# Altium PCB PCB2 Valiev.PcbDoc
Units mm, origin at the board's own origin, x right, y up, seen from the top; angles counter-clockwise.
Board outline 217.3 x 117.09 mm, 2 copper layers (Top Layer, Bottom Layer); 66 components, 52 nets, 197 pads, 19 vias.
Unrouted connection lines stored in the file: 5.
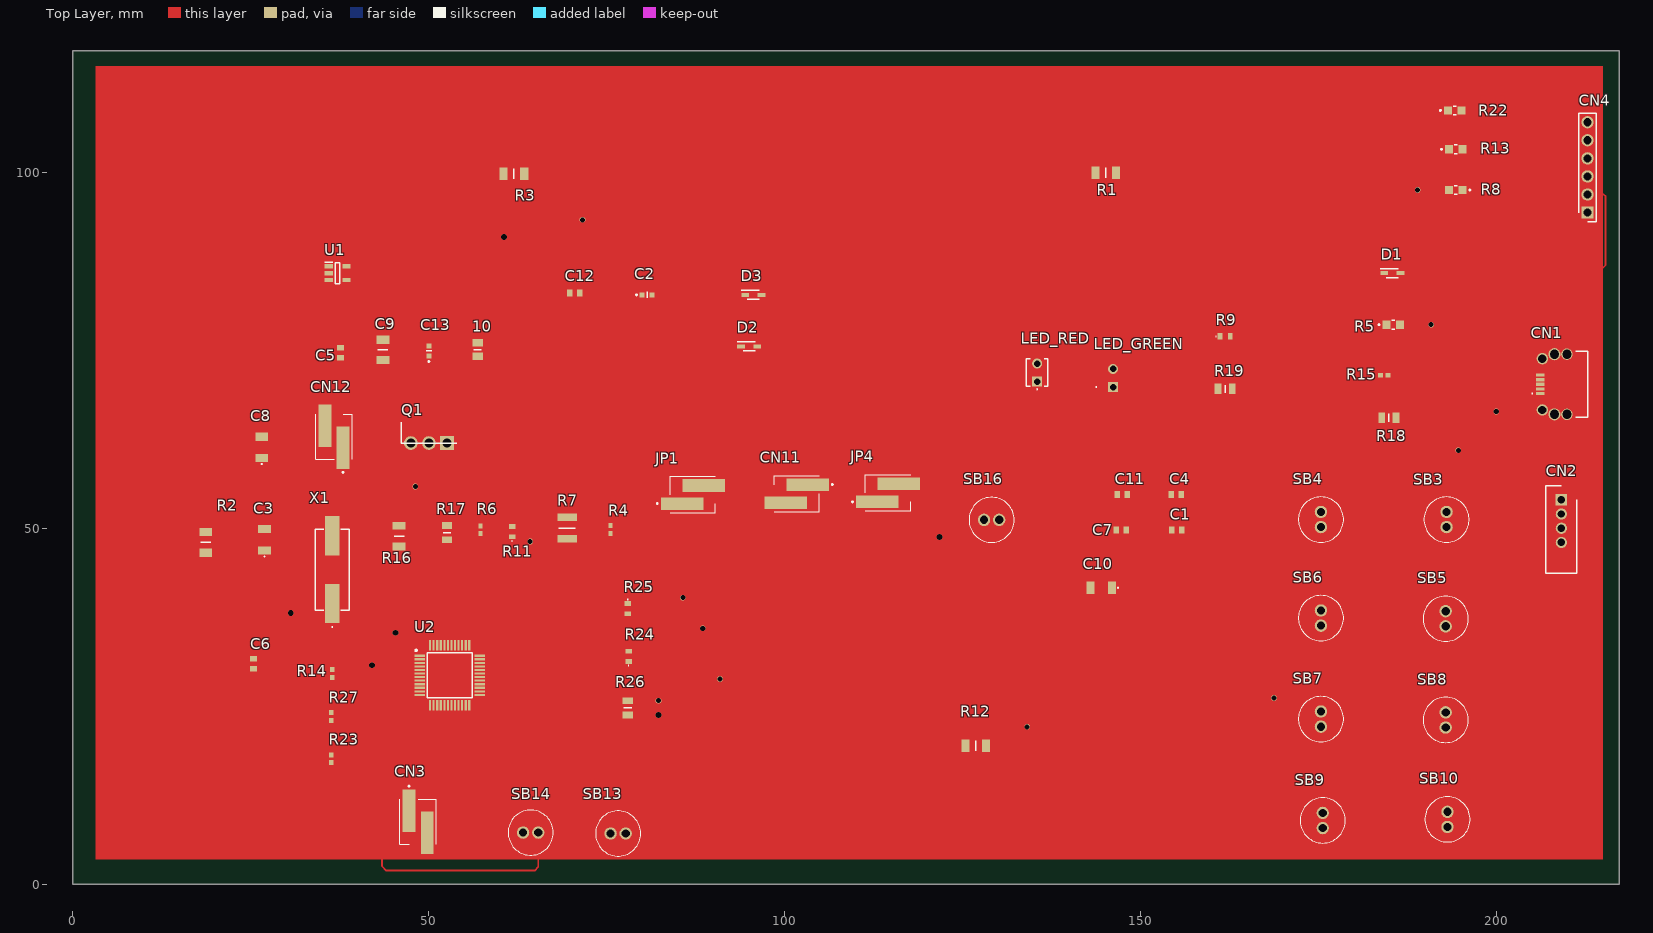
[diagram p0: Top Layer view]
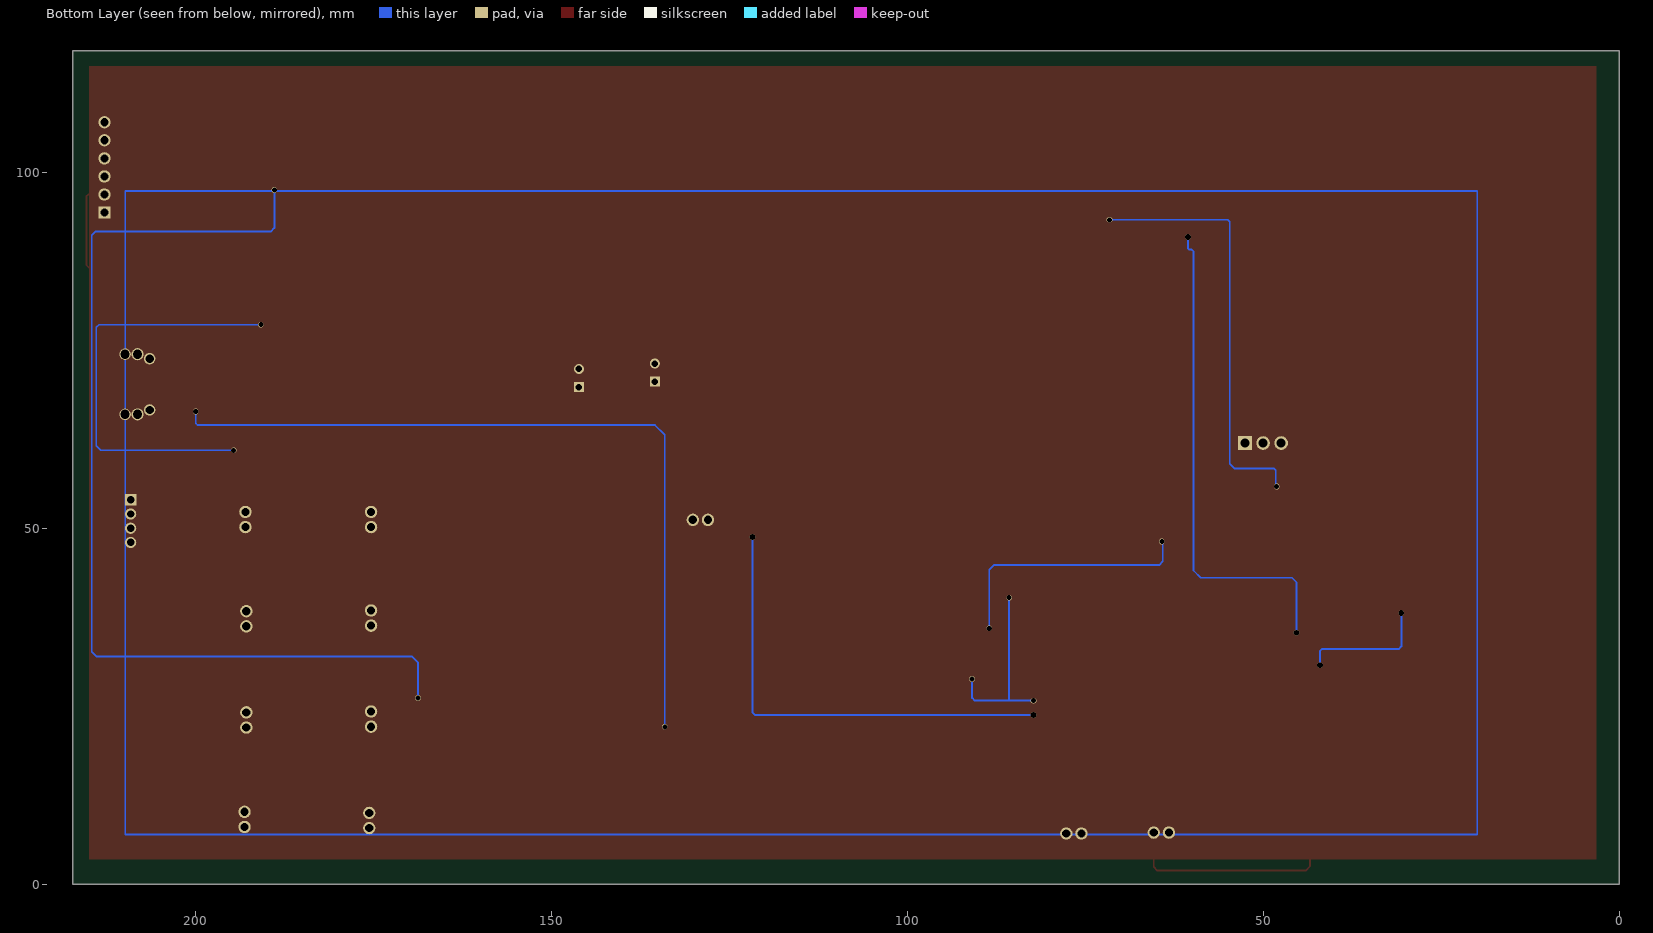
[diagram p1: Bottom Layer view, seen from below]
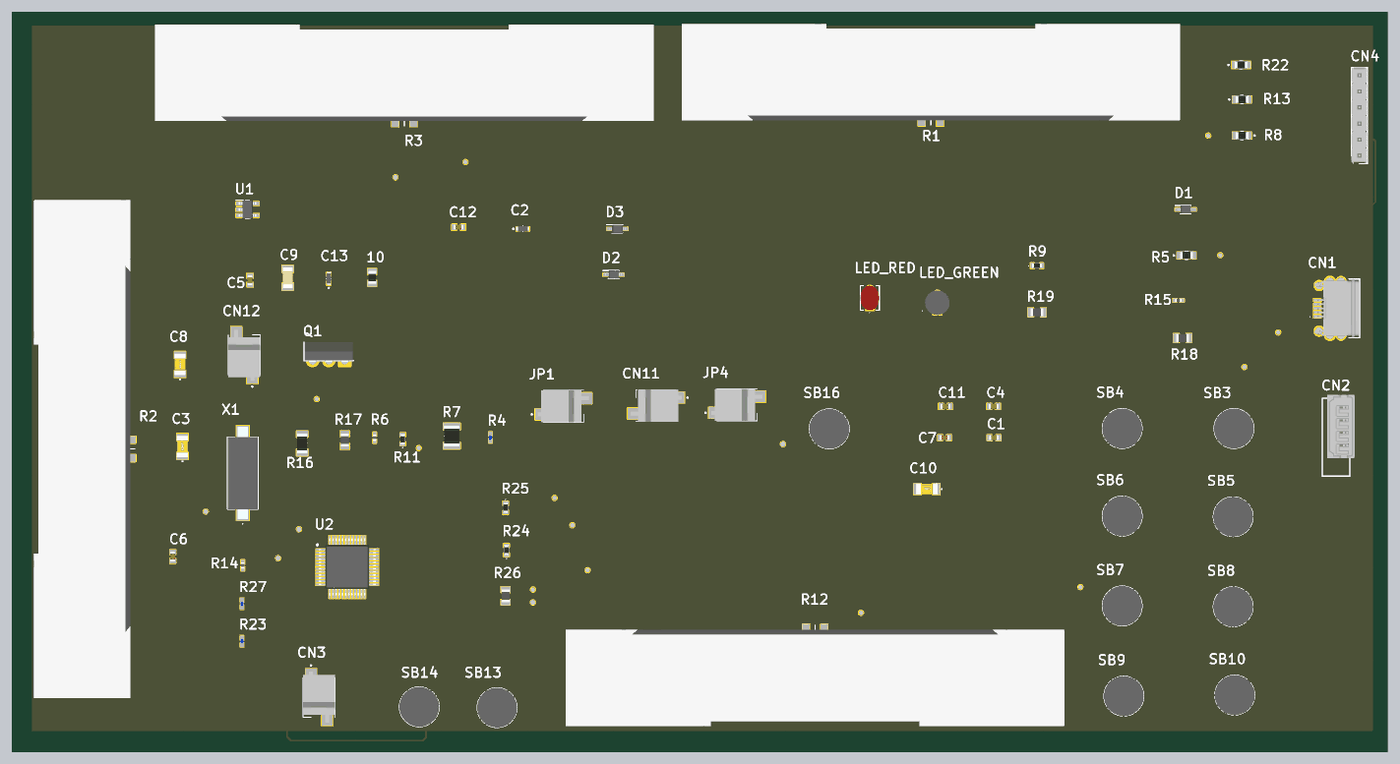
[diagram p2: 3D render of the assembled board from above, using the file's embedded part models]

## Layer stack, top to bottom
Top Solder: solder mask 0.0102, Solder Resist, Dk 3.5
Top Layer: signal copper 0.0356
Dielectric 1: dielectric 0.32, FR-4, Dk 4.8
Bottom Layer: signal copper 0.0356
Bottom Solder: solder mask 0.0102, Solder Resist, Dk 3.5

## Board outline
0,0 0,117.094 217.297,117.094 217.297,0

## Design rules (kind name [scope] priority, off if disabled: settings)
Clearance [All] p1: gap=0.254 ignorepadtopadclearanceinfootprint=FALSE
PolygonConnect [All] p1: connectstyle=Relief reliefconductorwidth=0.254 reliefentries=4 polygonreliefangle="90 Angle" airgapwidth=0.254
RoutingVias [All] p1: holewidth=0.711 width=1.27 viastyle="Through Hole" minholewidth=0.711 minwidth=1.27 maxholewidth=0.711 maxwidth=1.27
SolderMaskExpansion [All] p1: expansion=0.102 istentingtop=FALSE
Width [All] p1: maxlimit=0.254 minlimit=0.254 preferedwidth=0.254
30 further rules are at their usual default settings.

## Components (designator, comment, footprint, x,y, rotation, side; value= is the part's Value field where it differs from the comment)
10 "36k" RESC2012X55N 56.896,75.118 r270 top
C1 "100nF" CAPC1608X90N 155.132,49.784 r0 top
C2 "1uF" MAJx16 80.707,82.804 r0 top
C3 "20pF" C1206 26.924,48.387 r90 top
C4 "100nF" CAPC1608X90N 155.067,54.737 r0 top
C5 "100nF" CAPC1608X90N 37.592,74.676 r90 top
C6 "100nF" CAPC1608X90N 25.4,30.988 r270 top
C7 "100nF" CAPC1608X90N 147.32,49.784 r0 top
C8 "20pF" C1206 26.543,61.365 r90 top
C9 "10nF" CAPC3316X145N 43.561,75.057 r90 top
C10 "20pF" C1206 144.526,41.656 r180 top
C11 "100nF" CAPC1608X90N 147.447,54.737 r0 top
C12 "100nF" CAPC1608X90N 70.55,83.058 r180 top
C13 "1uF" MAJx16 50.038,74.93 r90 top
CN1 "204926-1103" 2049261103 209.423,70.231 r90 top
CN2 "53014-0410" SHDR4W60P0X200_1X4_1200X435X1000P 209.169,54.006 r90 top
CN3 "3-647166-2" 36471662 48.514,8.763 r180 top
CN4 "22-28-4062" HDRV6W66P0X254_1X6_1524X249X838P 212.852,94.361 r90 top
CN11 "3-647166-2" 36471662 101.731,54.864 r90 top
CN12 "3-647166-2" 36471662 36.703,62.861 r0 top
D1 "BAT60JFILM" SOD2513X117N 185.42,85.852 r0 top
D2 "BAT60JFILM" SOD2513X117N 95.043,75.565 r0 top
D3 "BAT60JFILM" SOD2513X117N 95.628,82.804 r0 top
JP1 "3-647166-2" 36471662 87.126,54.737 r270 top
JP4 "3-647166-2" 36471662 114.554,54.991 r270 top
LED_GREEN "C4SMA-GGY-CU2W37A1" C4SMAGGYCU2W37A1 146.177,69.85 r90 top
LED_RED "C4SMA-RGY-CS4V1BB1" C4SMARGYCS4V1BB1 135.509,70.612 r90 top
Q1 "BD139" TO254P290X760X1320-3P 52.578,61.976 r180 top
R1 "10k" RESC3216X74N 145.161,99.949 r180 top
R2 "10k" RESC3216X74N 18.669,48.006 r270 top
R3 "10k" RESC3216X74N 61.976,99.822 r180 top
R4 "4.7k" RESC1005X37N 75.565,49.826 r90 top
R5 "22" ERA6AEB1020V 185.547,78.613 r0 top
R6 "100k" RESC1005X40N 57.277,49.784 r90 top
R7 "2.7k" RESC3225X70N 69.469,50.038 r270 top
R8 "22" ERA6AEB1020V 194.31,97.536 r180 top
R9 "100" ERA3AEB101V 161.925,76.962 r0 top
R11 "100" ERA3AEB101V 61.722,49.53 r90 top
R12 "10k" RESC3216X74N 126.873,19.431 r0 top
R13 "22" ERA6AEB1020V 194.31,103.251 r0 top
R14 "100k" RESC1005X40N 36.449,29.591 r270 top
R15 "100k" RESC1005X40N 184.277,71.501 r180 top
R16 "1.5k" RESC3116X65N 45.847,48.895 r90 top
R17 "0" RESC2013X84N 52.578,49.403 r90 top
R18 "0" RESC2013X84N 184.928,65.532 r0 top
R19 "0" RESC2013X84N 161.925,69.596 r0 top
R22 "22" ERA6AEB1020V 194.183,108.712 r0 top
R23 "4.7k" RESC1005X37N 36.322,17.611 r90 top
R24 "100" ERA3AEB101V 78.105,32.004 r90 top
R25 "100" ERA3AEB101V 77.978,38.698 r270 top
R26 "0" RESC2013X84N 77.978,24.765 r90 top
R27 "4.7k" RESC1005X37N 36.322,23.537 r270 top
SB3 "8631CQD2" 8631CQD2 193.04,52.295 r270 top
SB4 "8631CQD2" 8631CQD2 175.387,50.165 r90 top
SB5 "8631CQD2" 8631CQD2 192.913,36.224 r90 top
SB6 "8631CQD2" 8631CQD2 175.387,38.452 r270 top
SB7 "8631CQD2" 8631CQD2 175.387,24.257 r270 top
SB8 "8631CQD2" 8631CQD2 192.913,24.13 r270 top
SB9 "8631CQD2" 8631CQD2 175.641,7.874 r90 top
SB10 "8631CQD2" 8631CQD2 193.167,10.16 r270 top
SB13 "8631CQD2" 8631CQD2 75.565,7.112 r0 top
SB14 "8631CQD2" 8631CQD2 63.275,7.239 r0 top
SB16 "8631CQD2" 8631CQD2 128.045,51.181 r0 top
U1 "LD3985M33R" SOT95P280X145-5N 37.211,85.852 r0 top
U2 "STM32F103CBT6" QFP50P900X900X160-48N 52.959,29.337 r0 top
X1 "ECS-80-12-5PX-GM-TR" ECS80125PXGMTR 36.449,44.196 r90 top

## Footprints (in the part's own frame and the unit in brackets; to place one, negate y for a bottom-side part, rotate by r counter-clockwise, add the part's x,y. Pads: shape width x height; smd on the part's side, far side on the other; paste and mask are expansions set on the pad)
8631CQD2 [mm]
  round 1.74 hole 1.16: 1(0,0) 2(2.13,0)
  silkscreen extent -2.11,-3.17 4.24,3.17, body extent -2.11,-3.18 4.24,3.18, height 14.03
36471662 [mm]
  rect 1.78x5.97 smd: 1(1.27,-1.52) 2(-1.27,1.52)
  silkscreen extent -2.54,-5.1 2.54,3.18, body extent -2.54,-4.08 2.54,4, height 10.55
2049261103 [mm]
  rect 0.45x1.2 smd: 1(-1.3,3.225) 2(-0.65,3.225) 3(0,3.225) 4(0.65,3.225) 5(1.3,3.225)
  round 1.6 hole 1.17: MH1(-3.6,2.925) MH2(3.6,2.925)
  round 1.7 hole 1.3: MH3(-4.225,1.225) MH4(4.225,1.225)
  round 1.6 hole 1.3: MH5(-4.225,-0.525) MH6(4.225,-0.525)
  silkscreen extent -4.65,-3.47 4.65,4.4, body extent -4.65,-3.32 4.65,3.68, height 3.83
C4SMAGGYCU2W37A1 [mm]
  rect 1.416x1.416 hole 0.91: 1(0,0)
  round 1.416 hole 0.91: 2(2.54,0)
  silkscreen extent -0.05,2.3 0.05,2.4, body extent -0.68,-1.95 3.22,1.95, height 8.9
C4SMARGYCS4V1BB1 [mm]
  rect 1.416x1.416 hole 0.91: 1(0,0)
  round 1.416 hole 0.91: 2(2.54,0)
  silkscreen extent -1.13,-1.5 3.22,1.5, body extent -0.68,-1.5 3.22,1.5, height 10.14
C1206 [mm]
  rect 1.15x1.8 smd: 1(-1.5,0) 2(1.5,0)
  silkscreen extent -2.4,-0.05 -2.3,0.05, body extent -1.7,-0.9 1.7,0.9, height 1.75
CAPC1608X90N [mm]
  rect 0.78x0.99 smd: 1(-0.7,0) 2(0.7,0)
  body extent -0.8,-0.41 0.8,0.41, height 0.9
CAPC3316X145N [mm]
  rect 1.17x1.82 smd: 1(-1.42,0) 2(1.42,0)
  silkscreen extent 0,-0.7 0,0.7, body extent -1.65,-0.8 1.65,0.8, height 1.68
ECS80125PXGMTR [mm]
  rect 5.5x2 smd: 1(-4.75,0) 2(4.75,0)
  silkscreen extent -8.1,-2.4 5.7,2.4, body extent -7.3,-2.4 7.3,2.4, height 4.4
ERA3AEB101V [mm]
  rect 0.65x0.9 smd: 1(-0.725,0) 2(0.725,0)
  silkscreen extent -1.35,-0.05 -1.25,0.05, body extent -0.8,-0.4 0.8,0.4, height 0.45
ERA6AEB1020V [mm]
  rect 1.15x1.15 smd: 1(-0.95,0) 2(0.95,0)
  silkscreen extent -2.1,-0.63 0.2,0.63, body extent -1,-0.63 1,0.63, height 0.5
HDRV6W66P0X254_1X6_1524X249X838P [mm]
  rect 1.725x1.725 hole 1.15: 1(0,0)
  round 1.725 hole 1.15: 2(2.54,0) 3(5.08,0) 4(7.62,0) 5(10.16,0) 6(12.7,0)
  silkscreen extent -1.27,-1.24 13.97,1.24, body extent -1.27,-1.24 13.97,1.24, height 9.65
MAJx16 [mm]
  rect 0.7x0.7 smd: 1(-0.7,0) 2(0.7,0)
  silkscreen extent -1.6,-0.4 0,0.4, body extent -0.98,-0.4 0.98,0.4, height 0.9
QFP50P900X900X160-48N [mm]
  rect 1.475x0.3 smd: 1(-4.238,2.75) 2(-4.238,2.25) 3(-4.238,1.75) 4(-4.238,1.25) 5(-4.238,0.75) 6(-4.238,0.25) 7(-4.238,-0.25) 8(-4.238,-0.75) 9(-4.238,-1.25) 10(-4.238,-1.75) 11(-4.238,-2.25) 12(-4.238,-2.75) 25(4.238,-2.75) 26(4.238,-2.25) 27(4.238,-1.75) 28(4.238,-1.25) 29(4.238,-0.75) 30(4.238,-0.25) 31(4.238,0.25) 32(4.238,0.75) 33(4.238,1.25) 34(4.238,1.75) 35(4.238,2.25) 36(4.238,2.75)
  rect 0.3x1.475 smd: 13(-2.75,-4.238) 14(-2.25,-4.238) 15(-1.75,-4.238) 16(-1.25,-4.238) 17(-0.75,-4.238) 18(-0.25,-4.238) 19(0.25,-4.238) 20(0.75,-4.238) 21(1.25,-4.238) 22(1.75,-4.238) 23(2.25,-4.238) 24(2.75,-4.238) 37(2.75,4.238) 38(2.25,4.238) 39(1.75,4.238) 40(1.25,4.238) 41(0.75,4.238) 42(0.25,4.238) 43(-0.25,4.238) 44(-0.75,4.238) 45(-1.25,4.238) 46(-1.75,4.238) 47(-2.25,4.238) 48(-2.75,4.238)
  silkscreen extent -4.85,-3.15 3.15,3.62, body extent -4.5,-4.5 4.5,4.5, height 1.6
RESC1005X37N [mm]
  rect 0.7x0.6 smd: 1(-0.55,0) 2(0.55,0)
  body extent -0.5,-0.25 0.5,0.25, height 0.32
RESC1005X40N [mm]
  rect 0.7x0.6 smd: 1(-0.55,0) 2(0.55,0)
  body extent -0.5,-0.25 0.5,0.25, height 0.4
RESC2012X55N [mm]
  rect 1x1.45 smd: 1(-0.95,0) 2(0.95,0)
  silkscreen extent 0,-0.53 0,0.53, body extent -1,-0.63 1,0.63, height 0.55
RESC2013X84N [mm]
  rect 0.95x1.45 smd: 1(-1,0) 2(1,0)
  silkscreen extent 0,-0.54 0,0.54, body extent -1.01,-0.64 1.01,0.64, height 0.36
RESC3116X65N [mm]
  rect 1.1x1.8 smd: 1(-1.45,0) 2(1.45,0)
  silkscreen extent 0,-0.7 0,0.7, body extent -1.55,-0.8 1.55,0.8, height 0.65
RESC3216X74N [mm]
  rect 1.15x1.8 smd: 1(-1.45,0) 2(1.45,0)
  silkscreen extent 0,-0.7 0,0.7, body extent -39.37,-15.24 39.37,0, height 40.64
RESC3225X70N [mm]
  rect 1.1x2.7 smd: 1(-1.5,0) 2(1.5,0)
  silkscreen extent 0,-1.15 0,1.15, body extent -1.6,-1.25 1.6,1.25, height 0.7
SHDR4W60P0X200_1X4_1200X435X1000P [mm]
  rect 1.575x1.575 hole 1.05: 1(0,0)
  round 1.575 hole 1.05: 2(-2,0) 3(-4,0) 4(-6,0)
  silkscreen extent -10.3,-2.17 2,2.17, body extent -7.45,-2.96 2.55,1.39, height 5.85
SOD2513X117N [mm]
  rect 1.085x0.55 smd: 1(-1.14,0) 2(1.14,0)
  silkscreen extent -1.68,-0.64 0.83,0.64, body extent -1.25,-0.64 1.25,0.64, height 1.17
SOT95P280X145-5N [mm]
  rect 1.15x0.6 smd: 1(-1.25,0.95) 2(-1.25,0) 3(-1.25,-0.95) 4(1.25,-0.95) 5(1.25,0.95)
  silkscreen extent -1.83,-1.48 0.33,1.5, body extent -1.4,-1.48 1.4,1.48, height 1.45
TO254P290X760X1320-3P [mm]
  rect 1.92x1.92 hole 1.28: 1(0,0)
  round 1.92 hole 1.28: 2(2.54,0) 3(5.08,0)
  silkscreen extent -1.36,-2.9 6.44,0, body extent -1.26,-2.9 6.34,0.26, height 12.93

## Part data
10: library part TNPW080536K0BEEA, "Resistor", Manufacturer_Name=Vishay, Datasheet Link=https://www.vishay.com/docs/31006/tnpw.pdf, Height=0.55mm, Manufacturer_Part_Number=TNPW080536K0BEEA
C1 C4 C5 C6 C7 C11 C12: library part 06035C104K4T4A, "Capacitor", Manufacturer_Name="Kyocera AVX", Mouser Part Number=581-06035C104K4T4A, Arrow Part Number=06035C104K4T4A, Arrow Price/Stock=https://www.arrow.com/en/products/06035c104k4t4a/avx, Datasheet Link=https://componentsearchengine.com/Datasheets/1/06031A100FAT2A.pdf, Height=100nF, Manufacturer_Part_Number=06035C104K4T4A, Mouser Price/Stock=https://www.mouser.co.uk/ProductDetail/KYOCERA-AVX/06035C104K4T4A?qs=NBj5Hwer2CEXBYKT%252BbuSBA%3D%3D
C2 C13: library part MAJCT168BB7105KTEA01, "Capacitor", Manufacturer_Name="TAIYO YUDEN", Datasheet Link=https://ds.yuden.co.jp/TYCOMPAS/or/detail?pn=MAJCT168BB7105KTEA01, Height=0.8mm, Manufacturer_Part_Number=MAJCT168BB7105KTEA01
C3 C8 C10: library part C1206C200KCGACTU, "Capacitor", Manufacturer_Name=KEMET, Datasheet Link=https://content.kemet.com/datasheets/KEM_C1009_C0G_HV_SMD.pdf, Manufacturer_Part_Number=C1206C200KCGACTU
C9: library part KGM31GCG2J103JU, "Capacitor", Manufacturer_Name="Kyocera AVX", Mouser Part Number=581-KGM31GCG2J103JU, Datasheet Link=https://datasheets.kyocera-avx.com/HVKGM.pdf, Height=1.45mm, Manufacturer_Part_Number=KGM31GCG2J103JU, Mouser Price/Stock=https://www.mouser.co.uk/ProductDetail/KYOCERA-AVX/KGM31GCG2J103JU?qs=63Lh8XYXgjt6ivbLeGkCxg%3D%3D
CN1: "Connector", Manufacturer_Name=Molex, Mouser Part Number=538-204926-1103, Arrow Part Number=204926-1103, Arrow Price/Stock=https://www.arrow.com/en/products/204926-1103/molex?region=nac, Datasheet Link=https://www.molex.com/content/dam/molex/molex-dot-com/products/automated/en-us/salesdrawingpdf/204/204926/2049261103_sd.pdf, Height=4.65mm, Manufacturer_Part_Number=204926-1103, Mouser Price/Stock=https://www.mouser.co.uk/ProductDetail/Molex/204926-1103?qs=55YtniHzbhBOQihiQOeiLg%3D%3D
CN2: "Connector", Manufacturer_Name=Molex, Mouser Part Number=538-53014-0410, Datasheet Link=https://www.molex.com/pdm_docs/sd/530140410_sd.pdf, Height=10mm, Manufacturer_Part_Number=53014-0410, Mouser Price/Stock=https://www.mouser.co.uk/ProductDetail/Molex/53014-0410?qs=TLs3Kb%252BkMqKk8s1WRHwRGw%3D%3D
CN3 CN11 CN12 JP1 JP4: "Connector", Manufacturer_Name="TE Connectivity", Mouser Part Number=571-3-647166-2, Arrow Part Number=3-647166-2, Arrow Price/Stock=https://www.arrow.com/en/products/3-647166-2/te-connectivity?region=nac, Datasheet Link=https://www.te.com/commerce/DocumentDelivery/DDEController?Action=showdoc&DocId=Customer+Drawing%7F647166%7FR1%7Fpdf%7FEnglish%7FENG_CD_647166_R1.pdf%7F3-647166-2, Height=10.66mm, Manufacturer_Part_Number=3-647166-2, Mouser Price/Stock=https://www.mouser.co.uk/ProductDetail/TE-Connectivity/3-647166-2?qs=xsTFCgGnzbJU1qz6Np9kzA%3D%3D
CN4: "Connector", Manufacturer_Name=Molex, Mouser Part Number=538-22-28-4062, Datasheet Link=https://datasheet.datasheetarchive.com/originals/distributors/SFDatasheet-1/sf-00031037.pdf, Height=8.38mm, Manufacturer_Part_Number=22-28-4062, Mouser Price/Stock=https://www.mouser.com/Search/Refine.aspx?Keyword=538-22-28-4062
D1 D2 D3: "Schottky Diode", Manufacturer_Name=STMicroelectronics, Mouser Part Number=511-BAT60JFILM, Arrow Part Number=BAT60JFILM, Arrow Price/Stock=https://www.arrow.com/en/products/bat60jfilm/stmicroelectronics?region=nac, Datasheet Link=https://www.mouser.jp/datasheet/2/389/cd00001944-1795661.pdf, Height=1.17mm, Manufacturer_Part_Number=BAT60JFILM, Mouser Price/Stock=https://www.mouser.co.uk/ProductDetail/STMicroelectronics/BAT60JFILM?qs=GnFZssByvVVVnMaukcyLZg%3D%3D
LED_GREEN: "LED", Manufacturer_Name="CREE LED", Mouser Part Number=941-C4SMAGGYCU2W37A1, Datasheet Link=https://cree-led.com/media/documents/C4SMA-1442.pdf, Height=8.8mm, Manufacturer_Part_Number=C4SMA-GGY-CU2W37A1, Mouser Price/Stock=https://www.mouser.co.uk/ProductDetail/Cree-LED/C4SMA-GGY-CU2W37A1?qs=7D1LtPJG0i1gnYL5Rh9Mjg%3D%3D
LED_RED: "LED", Manufacturer_Name="CREE LED", Mouser Part Number=941-C4SMARGYCS4V1BB1, Arrow Part Number=C4SMA-RGY-CS4V1BB1, Arrow Price/Stock=https://www.arrow.com/en/products/c4sma-rgy-cs4v1bb1/cree-led?region=nac, Datasheet Link=https://cree-led.com/media/documents/C4SMA-1442.pdf, Height=8.8mm, Manufacturer_Part_Number=C4SMA-RGY-CS4V1BB1, Mouser Price/Stock=https://www.mouser.co.uk/ProductDetail/Cree-LED/C4SMA-RGY-CS4V1BB1?qs=7D1LtPJG0i08%2Fw1qRIcnyw%3D%3D
Q1: "Transistor BJT NPN", Manufacturer_Name=STMicroelectronics, Mouser Part Number=511-BD139, Arrow Part Number=BD139, Arrow Price/Stock=https://www.arrow.com/en/products/bd139/stmicroelectronics?region=europe, Datasheet Link=http://www.st.com/web/en/resource/technical/document/datasheet/CD00001225.pdf, Height=2.9mm, Manufacturer_Part_Number=BD139, Mouser Price/Stock=https://www.mouser.co.uk/ProductDetail/STMicroelectronics/BD139?qs=ljbEvF4DwOPW%2FLxHSWYMMA%3D%3D
R1 R2 R3 R12: library part CRMV1206AF10K0FKE5, "Resistor", Manufacturer_Name=Vishay, Mouser Part Number=71-RMV1206AF10K0FKE5, Datasheet Link=https://www.vishay.com/docs/68037/crmv.pdf, Height=0.74mm, Manufacturer_Part_Number=CRMV1206AF10K0FKE5, Mouser Price/Stock=https://www.mouser.co.uk/ProductDetail/Vishay-Techno/CRMV1206AF10K0FKE5?qs=l8RvIzyJx4lLA%2F4RSSc%2F9A%3D%3D
R4 R23 R27: library part MCS04020D4701BE000, "Resistor", Manufacturer_Name=Vishay, Mouser Part Number=594-MCS04020D4701BE0, Datasheet Link=http://www.vishay.com/docs/28705/mcx0x0xpro.pdf, Height=0.37mm, Manufacturer_Part_Number=MCS04020D4701BE000, Mouser Price/Stock=https://www.mouser.co.uk/ProductDetail/Vishay-Beyschlag/MCS04020D4701BE000?qs=ft9OtscSA3%252BR0DpF5QqL2Q%3D%3D
R5 R8 R13 R22: library part ERA-6AHD220V, "Resistor", Manufacturer_Name=Panasonic, Mouser Part Number=667-ERA-6AHD220V, Datasheet Link=https://industrial.panasonic.com/cdbs/www-data/pdf/RDM0000/AOA0000C307.pdf, Height=0.6mm, Manufacturer_Part_Number=ERA-6AHD220V, Mouser Price/Stock=https://www.mouser.co.uk/ProductDetail/Panasonic/ERA-6AHD220V/?qs=MNPzkKEzRtQTWqg2JSKn2A%3D%3D
R6 R14 R15: library part SFR01MZPF1003, "Resistor", Manufacturer_Name="ROHM Semiconductor", Mouser Part Number=755-SFR01MZPF1003, Datasheet Link=https://fscdn.rohm.com/en/products/databook/datasheet/passive/resistor/chip_resistor/sfr-e.pdf, Height=0.4mm, Manufacturer_Part_Number=SFR01MZPF1003, Mouser Price/Stock=https://www.mouser.co.uk/ProductDetail/ROHM-Semiconductor/SFR01MZPF1003?qs=Mv7BduZupUj2RFL5gMaKTg%3D%3D
R7: library part CRCW12102K70FKEAHP, "Resistor", Manufacturer_Name=Vishay, Mouser Part Number=71-CRCW12102K70FKEAH, Datasheet Link=http://componentsearchengine.com/Datasheets/1/CRCW12102K70FKEAHP.pdf, Height=0.7mm, Manufacturer_Part_Number=CRCW12102K70FKEAHP, Mouser Price/Stock=https://www.mouser.co.uk/ProductDetail/Vishay-Dale/CRCW12102K70FKEAHP?qs=OAzHGkhREL0m0%252BU1n6AaAg%3D%3D
R9 R11 R24 R25: library part ERA-3AED101V, "Resistor", Manufacturer_Name=Panasonic, Mouser Part Number=667-ERA-3AED101V, Arrow Part Number=ERA-3AED101V, Arrow Price/Stock=https://www.arrow.com/en/products/era-3aed101v/panasonic, Datasheet Link=https://industrial.panasonic.com/cdbs/www-data/pdf/RDM0000/AOA0000C307.pdf, Height=0.55mm, Manufacturer_Part_Number=ERA-3AED101V, Mouser Price/Stock=https://www.mouser.co.uk/ProductDetail/Panasonic/ERA-3AED101V?qs=MNPzkKEzRtTdzGewEn1kig%3D%3D
R16: library part CRCW12061K50FKEAHP, "Resistor", Manufacturer_Name=Vishay, Mouser Part Number=71-CRCW12061K50FKEAH, Arrow Part Number=CRCW12061K50FKEAHP, Arrow Price/Stock=https://www.arrow.com/en/products/crcw12061k50fkeahp/vishay?region=nac, Datasheet Link=http://componentsearchengine.com/Datasheets/1/CRCW12061K50FKEAHP.pdf, Height=0.65mm, Manufacturer_Part_Number=CRCW12061K50FKEAHP, Mouser Price/Stock=https://www.mouser.co.uk/ProductDetail/Vishay-Dale/CRCW12061K50FKEAHP?qs=k2%2FDWSARqgEwHXAQbL4aEg%3D%3D
R17 R18 R19 R26: library part WSL080500000ZEA9, "Resistor", Manufacturer_Name=Vishay, Mouser Part Number=71-WSL080500000ZEA9, Arrow Part Number=WSL080500000ZEA9, Arrow Price/Stock=https://www.arrow.com/en/products/wsl080500000zea9/vishay?region=nac, Datasheet Link=https://ad.componentsearchengine.com/Datasheets/2/WSL080500000ZEA9.pdf, Height=0.838mm, Manufacturer_Part_Number=WSL080500000ZEA9, Mouser Price/Stock=https://www.mouser.co.uk/ProductDetail/Vishay-Dale/WSL080500000ZEA9?qs=f1l5vAGoKgsImKS87N8TmQ%3D%3D
SB3 SB4 SB5 SB6 SB7 SB8 SB9 SB10 SB13 SB14 SB16: "Switch (2-Pin Push)", Manufacturer_Name="C & K COMPONENTS", Mouser Part Number=611-8631-261, Datasheet Link=https://www.ckswitches.com/media/1396/8600.pdf, Height=13.93mm, Manufacturer_Part_Number=8631CQD2, Mouser Price/Stock=https://www.mouser.co.uk/ProductDetail/CK/8631CQD2?qs=ktcBc77oICXe9iPhfEwnkA%3D%3D
U1: "Integrated Circuit", Manufacturer_Name=STMicroelectronics, Mouser Part Number=511-LD3985M33R, Arrow Part Number=LD3985M33R, Arrow Price/Stock=https://www.arrow.com/en/products/ld3985m33r/stmicroelectronics?region=europe, Datasheet Link=http://www.st.com/st-web-ui/static/active/en/resource/technical/document/datasheet/CD00003395.pdf, Height=1.45mm, Manufacturer_Part_Number=LD3985M33R, Mouser Price/Stock=https://www.mouser.co.uk/ProductDetail/STMicroelectronics/LD3985M33R?qs=22WmWNTp1rrPOccVv4HZ7A%3D%3D
U2: "Integrated Circuit", Manufacturer_Name=STMicroelectronics, Mouser Part Number=511-STM32F103CBT6, Arrow Part Number=STM32F103CBT6, Arrow Price/Stock=https://www.arrow.com/en/products/stm32f103cbt6/stmicroelectronics?region=europe, Datasheet Link=http://www.st.com/st-web-ui/static/active/en/resource/technical/document/datasheet/CD00161566.pdf, Height=1.6mm, Manufacturer_Part_Number=STM32F103CBT6, Mouser Price/Stock=https://www.mouser.co.uk/ProductDetail/STMicroelectronics/STM32F103CBT6?qs=WxFF5lh7QM3goh6GV5Ogig%3D%3D
X1: "Crystal or Oscillator", Manufacturer_Name=ECS, Mouser Part Number=520-80-12-5PX-GM-TR, Datasheet Link=https://ecsxtal.com/store/pdf/csm-7x.pdf, Height=4.3mm, Manufacturer_Part_Number=ECS-80-12-5PX-GM-TR, Mouser Price/Stock=https://www.mouser.co.uk/ProductDetail/ECS/ECS-80-12-5PX-GM-TR?qs=amGC7iS6iy%252BwzUdIY7WpOA%3D%3D

## Via types
v1: diameter 0.8, hole 0.711, Top Layer to Bottom Layer, 13 vias
v2: diameter 0.8, hole 0.8, Top Layer to Bottom Layer, 3 vias
v3: diameter 0.811, hole 0.811, Top Layer to Bottom Layer, 3 vias

## Nets (pads, with @x,y where several pads share a name; then routed paths per layer and width w, separated by ;. In a path a pad name is that pad's centre, name@x,y a point inside that pad or via, vN(x,y) a via of type N, cw(c..) or ccw(c..) an arc to the next point about the centre after c; other vN are vias at no path point)
+3V3: R23.1
+3V3_ST_LINK: C1.2 C4.2 C7.2 C11.2 JP1.1 Q1.2 R14.2 R19.2 R26.2 SB4.2 U2.1 U2.9 U2.24 U2.36 U2.48 | length 267.5
  Top Layer w0.254: Q1.2 50.038,56.769 50.673,56.134 55.118,56.134 55.626,55.626 55.626,46.863 55.118,46.355 51.181,46.355 50.678,45.852 50.678,34.044 50.62,34.044 50.209,33.633 U2.48 ; U2.24 55.709,24.047 56.261,23.495 68.326,23.495 69.088,24.257 69.088,25.4 69.469,25.781 75.057,25.781 ; R26.2 77.962,25.781 75.057,25.781 ; v1(82.296,25.781) 81.407,25.781 81.153,26.035 81.153,26.924 80.899,27.178 75.311,27.178 75.057,26.924 75.057,25.781 ; JP1.1 85.725,53.348 v1(85.725,40.259) ; v1(90.932,28.829) 149.225,28.829 149.86,29.464 149.86,47.752 ; C7.2 148.147,49.911 148.147,52.07 ; C11.2 148.147,52.07 ; C4.2 164.973,54.737 ; C1.2 164.973,49.784 ; R19.2 163.052,69.469 164.592,69.469 164.973,69.088 164.973,54.737 ; SB4.2 165.002,52.295 164.973,52.324 ; 148.147,52.07 149.479,52.07 149.86,51.689 149.86,47.752 ; 149.86,47.752 164.592,47.752 164.973,48.133 164.973,49.784 ; 164.973,49.784 164.973,52.324 ; 164.973,52.324 164.973,54.737
  Bottom Layer w0.254: v1(82.296,25.781) 85.852,25.781 ; v1(85.725,40.259) 85.725,25.908 85.852,25.781 ; v1(90.932,28.829) 90.932,26.162 90.551,25.781 85.852,25.781
E5V: D2.2 D3.2 R7.1 | length 63.9
  Top Layer w0.254: R7.1 69.469,69.85 70.231,70.612 98.298,70.612 98.679,70.993 98.679,75.565 ; D2.2 98.679,75.565 ; D3.2 98.171,82.804 98.679,82.296 98.679,75.565
GND: 10.1 C1.1 C2.1 C3.2 C4.1 C5.1 C6.1 C7.1 C8.2 C9.1 C10.1 C11.1 C12.1 C13.1 CN1.5 CN1.MH1 CN1.MH2 CN1.MH3 CN1.MH4 CN1.MH5 CN1.MH6 CN4.3 CN11.1 CN11.2 CN12.1 CN12.2 JP4.1 LED_RED.2 R1.2 R2.1 R3.1 R4.2 R6.2 R15.1 R27.1 SB8.2 U1.2 U2.8 U2.20 U2.23 U2.35 U2.47 | length 21.4
  Top Layer w0.254: R15.1 184.842,71.516 206.183,71.516 CN1.5
Net10_2: 10.2 Q1.1 R11.2 R12.1 | length 130.6
  Top Layer w0.254: Q1.1 52.578,59.944 53.086,59.436 56.896,59.436 ; 10.2 56.896,59.436 ; R11.2 61.722,52.578 ; v1(64.262,48.133) 64.262,52.324 64.008,52.578 61.722,52.578 ; v1(88.519,35.941) 88.519,27.305 89.027,26.797 124.841,26.797 125.423,26.215 R12.1 ; 56.896,59.436 61.214,59.436 61.722,58.928 61.722,52.578
  Bottom Layer w0.254: v1(64.262,48.133) 64.135,48.006 64.135,45.339 64.643,44.831 87.884,44.831 88.519,44.196 v1(88.519,35.941)
NetC2_2: C2.2 D3.1 | length 13.1
  Top Layer w0.254: C2.2 D3.1
NetC3_1: C3.1 C8.1 U2.6 X1.1 X1.2 | length 66.8
  Top Layer w0.254: C8.1 26.543,57.785 27.051,57.277 30.226,57.277 30.607,56.896 30.607,48.895 ; C3.1 30.583,46.887 30.607,46.863 ; v2(30.607,38.1) 30.607,39.497 ; X1.1 30.658,39.446 30.607,39.497 ; X1.2 36.398,48.895 30.607,48.895 ; v2(42.037,30.734) 42.037,29.845 42.295,29.587 U2.6 ; 30.607,39.497 30.607,46.863 ; 30.607,46.863 30.607,48.895
  Bottom Layer w0.254: v2(30.607,38.1) 30.607,33.401 30.988,33.02 41.783,33.02 42.037,32.766 v2(42.037,30.734)
NetC5_2: C5.2 D2.1 U1.1 U1.3 | length 101.7
  Top Layer w0.254: U1.3 33.97,84.902 33.655,85.217 33.655,86.802 ; U1.1 33.655,86.802 ; C5.2 37.53,75.438 31.75,75.438 ; D2.1 63.881,75.565 63.246,76.2 63.246,79.502 62.484,80.264 54.864,80.264 54.483,79.883 54.483,72.644 53.975,72.136 32.385,72.136 31.75,72.771 31.75,75.438 ; 31.75,75.438 31.75,86.233 32.319,86.802 33.655,86.802
NetC6_2: C6.2 R14.1 U2.7 | length 31.3
  Top Layer w0.254: C6.2 25.4,28.575 25.781,28.194 40.64,28.194 40.894,28.448 40.894,28.956 ; R14.1 36.491,30.099 40.64,30.099 40.894,29.845 40.894,28.956 ; U2.7 41.025,29.087 40.894,28.956
NetC9_2: C9.2 U1.4 | length 13.2
  Top Layer w0.254: U1.4 38.481,84.882 38.481,76.962 38.966,76.477 C9.2
NetC10_2: C10.2 R25.2 SB16.1 | length 78
  Top Layer w0.254: R25.2 127.635,37.973 128.045,38.383 128.045,41.656 ; SB16.1 128.045,41.656 ; C10.2 128.045,41.656
NetC12_2: C12.2 C13.2 U1.5 | length 45.6
  Top Layer w0.254: U1.5 38.522,86.741 45.974,86.741 46.482,86.233 46.482,83.058 ; C13.2 46.798,75.63 46.482,75.946 46.482,83.058 ; C12.2 46.482,83.058
NetCN1_2: CN1.2 R18.2 | length 23.7
  Top Layer w0.254: R18.2 195.961,65.532 196.596,66.167 196.596,69.088 197.104,69.596 197.709,69.596 197.724,69.581 CN1.2
NetCN1_3: CN1.3 R16.2 R17.2 | length 232.4
  Top Layer w0.254: R16.2 48.133,50.345 ; v1(48.133,55.88) 48.133,50.345 ; R17.2 52.52,50.345 48.133,50.345 ; v1(71.628,93.345) 103.378,93.345 103.505,93.472 104.521,92.456 104.521,75.438 105.664,74.295 170.18,74.295 170.942,73.533 170.942,68.707 171.831,67.818 194.564,67.818 194.818,68.072 194.818,69.596 195.453,70.231 CN1.3
  Bottom Layer w0.254: v1(48.133,55.88) 48.26,56.007 48.26,58.166 48.514,58.42 54.102,58.42 54.737,59.055 54.737,93.091 54.991,93.345 v1(71.628,93.345)
NetCN1_4: CN1.4 R15.2 | length 24.3
  Top Layer w0.254: R15.2 183.727,70.146 183.896,69.977 188.849,69.977 189.753,70.881 CN1.4
NetCN2_1: CN2.1 SB3.2 SB4.1 | length 48.9
  Top Layer w0.254: SB4.1 187.071,50.165 ; SB3.2 187.071,50.165 ; CN2.1 202.977,54.006 202.311,53.34 202.311,53.213 202.184,53.086 202.184,47.371 201.676,46.863 187.96,46.863 187.071,47.752 187.071,50.165
NetCN2_2: CN2.2 SB5.2 SB6.1 | length 51.9
  Top Layer w0.254: SB6.1 175.436,38.403 187.198,38.403 ; SB5.2 192.864,38.403 187.198,38.403 ; CN2.2 205.422,52.006 204.724,51.308 204.724,46.355 204.089,45.72 187.96,45.72 187.198,44.958 187.198,38.403
NetCN2_3: CN2.3 SB7.2 SB8.1 | length 68.3
  Top Layer w0.254: SB7.2 184.941,22.127 185.039,22.225 185.039,24.257 ; SB8.1 192.786,24.257 185.039,24.257 ; CN2.3 206.216,50.006 205.613,49.403 205.613,32.131 204.724,31.242 185.674,31.242 185.039,30.607 185.039,24.257
NetCN2_4: CN2.4 SB9.2 SB10.1 | length 77.3
  Top Layer w0.254: SB9.2 175.719,10.082 186.563,10.082 ; SB10.1 193.089,10.082 186.563,10.082 ; CN2.4 209.169,18.034 208.407,17.272 187.198,17.272 186.563,16.637 186.563,10.082
NetCN3_1: CN3.1 SB14.2 U2.12 | length 60.2
  Top Layer w0.254: CN3.1 43.557,10.283 43.434,10.16 ; U2.12 43.859,26.587 43.434,26.162 43.434,10.16 ; SB14.2 65.405,2.413 64.897,1.905 44.069,1.905 43.434,2.54 43.434,10.16
NetCN3_2: CN3.2 SB13.2 U2.13 | length 55.8
  Top Layer w0.254: CN3.2 50.415,7.874 52.578,7.874 53.086,8.382 53.086,16.256 ; U2.13 50.209,23.07 50.673,22.606 52.451,22.606 53.086,21.971 53.086,16.256 ; SB13.2 77.695,15.142 76.708,16.129 53.213,16.129 53.086,16.256
NetCN4_1: CN4.1 D1.2 R1.1 | length 80.3
  Top Layer w0.254: R1.1 146.558,99.896 146.558,94.996 147.193,94.361 186.69,94.361 ; D1.2 186.669,85.852 186.817,86 186.817,94.234 186.69,94.361 ; CN4.1 186.69,94.361
NetCN4_2: CN4.2 R5.1 | length 50.3
  Top Layer w0.254: R5.1 184.597,82.616 185.039,83.058 192.405,83.058 193.294,83.947 193.294,85.979 193.272,86.001 193.272,86.211 193.548,86.487 214.884,86.487 215.392,86.995 215.392,96.647 215.138,96.901 CN4.2
NetCN4_4: CN4.4 R8.1 | length 21.3
  Top Layer w0.254: R8.1 195.326,97.602 195.326,99.949 195.58,100.203 206.756,100.203 207.264,100.711 207.264,101.6 207.645,101.981 CN4.4
NetCN4_5: CN4.5 R13.1 | length 23.9
  Top Layer w0.254: R13.1 193.36,106.111 193.675,106.426 202.057,106.426 202.438,106.045 202.438,105.029 202.946,104.521 CN4.5
NetCN4_6: CN4.6 R22.1 | length 26.8
  Top Layer w0.254: R22.1 193.294,108.773 193.294,111.633 193.675,112.014 205.105,112.014 205.867,111.252 205.867,107.696 206.502,107.061 CN4.6
NetD1_1: D1.1 R9.1 | length 31.7
  Top Layer w0.254: R9.1 161.163,76.999 161.163,85.217 161.798,85.852 D1.1
NetJP1_2: JP1.2 R4.1 R7.2 U2.39 | length 72.4
  Top Layer w0.254: U2.39 54.709,41.755 55.118,42.164 68.834,42.164 69.469,42.799 69.469,46.101 ; R7.2 69.469,46.101 ; R4.1 75.565,46.228 75.692,46.101 ; JP1.2 88.646,61.468 88.138,61.976 79.375,61.976 78.994,61.595 78.994,46.863 78.232,46.101 75.692,46.101 ; 69.469,46.101 75.692,46.101
NetJP4_2: JP4.2 R26.1 U2.21 | length 111
  Top Layer w0.254: U2.21 54.209,22.88 54.737,22.352 77.978,22.352 ; R26.1@78.121,23.622 R26.1 77.978,22.909 78,22.887 78,22.374 77.978,22.352 ; v3(82.296,23.749) 82.296,22.606 82.042,22.352 77.978,22.352 ; JP4.2 121.412,56.261 121.92,55.753 121.92,48.895 v3(121.793,48.768)
  Bottom Layer w0.254: v3@82.423,23.622 v3(82.296,23.749) 121.412,23.749 121.793,24.13 v3(121.793,48.768)
NetLED_GREEN_1: LED_GREEN.1 R19.1 | length 14.9
  Top Layer w0.254: LED_GREEN.1 146.431,69.596 R19.1
NetLED_GREEN_2: LED_GREEN.2
NetLED_RED_1: LED_RED.1
NetQ1_3: Q1.3 R16.1 | length 21.9
  Top Layer w0.254: R16.1 42.979,47.445 42.545,47.879 42.545,58.039 43.053,58.547 46.99,58.547 47.498,59.055 Q1.3
NetR2_2: R2.2 U2.3 | length 44.5
  Top Layer w0.254: R2.2 20.627,46.556 20.828,46.355 20.828,35.433 21.336,34.925 43.434,34.925 44.069,34.29 44.069,31.496 44.478,31.087 U2.3
NetR3_2: R3.2 U2.2 | length 85.4
  Top Layer w0.254: v3(45.339,35.306) 45.339,32.004 45.756,31.587 U2.2 ; R3.2 60.579,99.769 v2(60.579,90.932)
  Bottom Layer w0.254: v3(45.339,35.306) 45.339,42.418 45.974,43.053 58.801,43.053 59.817,44.069 59.817,88.9 60.071,89.154 60.43,89.154 60.579,89.303 v2(60.579,90.932)
NetR5_2: R5.2 SB3.1 | length 74
  Top Layer w0.254: R5.2 v1(190.881,78.613) ; SB3.1 193.04,60.706 193.294,60.96 v1(194.691,60.96)
  Bottom Layer w0.254: v1(190.881,78.613) 213.614,78.613 213.995,78.232 213.995,61.595 213.36,60.96 v1(194.691,60.96)
NetR6_1: R6.1 U2.44 | length 20.3
  Top Layer w0.254: U2.44 52.209,44.716 52.578,45.085 56.896,45.085 57.277,45.466 R6.1
NetR8_2: R8.2 SB7.1 | length 153.7
  Top Layer w0.254: v1(168.783,26.162) 168.783,25.273 169.799,24.257 SB7.1 ; v1(188.976,97.536) R8.2
  Bottom Layer w0.254: v1(168.783,26.162) 168.783,31.115 169.672,32.004 213.995,32.004 214.63,32.639 214.63,91.186 214.122,91.694 189.484,91.694 188.976,92.202 v1(188.976,97.536)
NetR20_1: 
NetR23_2: R23.2 R27.2 U2.10 | length 21.1
  Top Layer w0.254: R23.2 R27.2 40.894,22.987 41.529,23.622 41.529,26.924 42.192,27.587 U2.10
NetR24_1: R24.1 U2.25 | length 25.2
  Top Layer w0.254: U2.25 66.211,26.587 66.675,27.051 66.675,30.988 66.966,31.279 R24.1
NetR24_2: R24.2 U2.27 | length 25.4
  Top Layer w0.254: U2.27 64.163,27.587 64.77,28.194 64.77,32.258 65.278,32.766 78.068,32.766 R24.2
NetR25_1: R25.1 U2.29 | length 30.8
  Top Layer w0.254: U2.29 62.496,28.587 62.992,29.083 62.992,38.608 63.627,39.243 77.798,39.243 R25.1
NetSB5_1: SB5.1
NetSB9_1: SB9.1
NetSB12_2: 
NetSB13_1: SB13.1
NetSB14_1: SB14.1
NetSB15_2: 
NetSB16_2: SB16.2
NetU2_28: U2.28
U5V: CN1.1 R12.2 | length 125.9
  Top Layer w0.254: R12.2 128.323,21.643 128.778,22.098 v1(134.112,22.098) ; v1(200.025,66.421) 200.025,68.453 200.503,68.931 CN1.1
  Bottom Layer w0.254: v1(134.112,22.098) 134.112,63.119 135.509,64.516 199.771,64.516 200.025,64.77 v1(200.025,66.421)
pads on no net: R9.2 R11.1 R13.2 R17.1 R18.1 R22.2 SB6.2 SB10.2 U2.4 U2.5 U2.11 U2.14 U2.15 U2.16 U2.17 U2.18 U2.19 U2.22 U2.26 U2.30 U2.31 U2.32 U2.33 U2.34 U2.37 U2.38 U2.40 U2.41 U2.42 U2.43 U2.45 U2.46
copper on no net: | length 560.8
  Bottom Layer w0.254: 19.939,6.985 209.931,6.985 209.931,97.409 19.939,97.409 19.939,6.985

## Other copper
Top Layer:
  rectangle net GND: 3.175,3.429 215.011,114.935

## Silkscreen, mask and mechanical layers (free items; w line width, h text height)
Mechanical 1:
  lines w0.254: -0.127,-0.127 217.17,-0.127 217.17,116.967 -0.127,116.967 -0.127,-0.127